# EAGLE board cs_v2 (EAGLE 9.6.1)
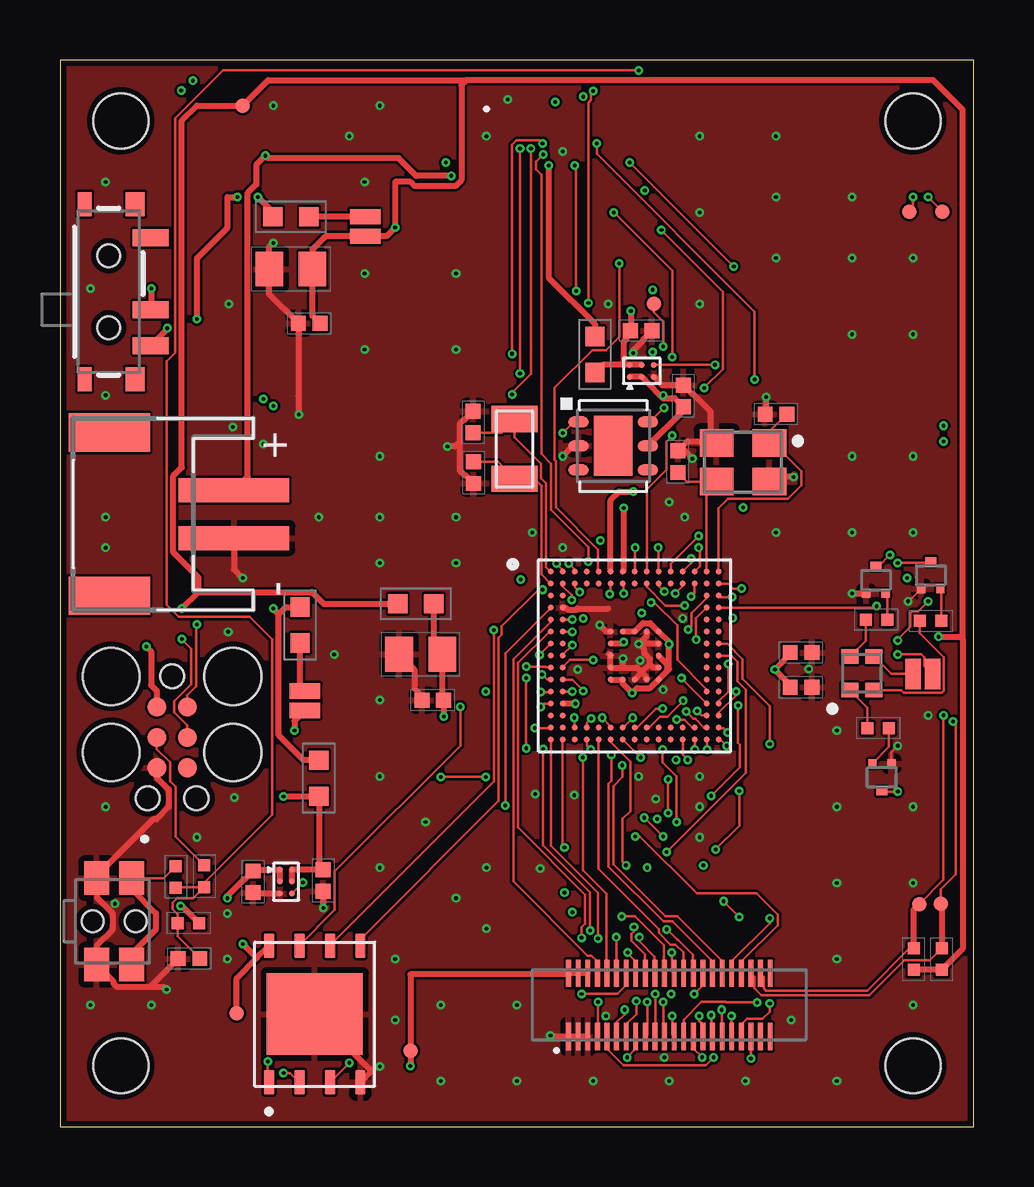
[diagram p0: board, top side]
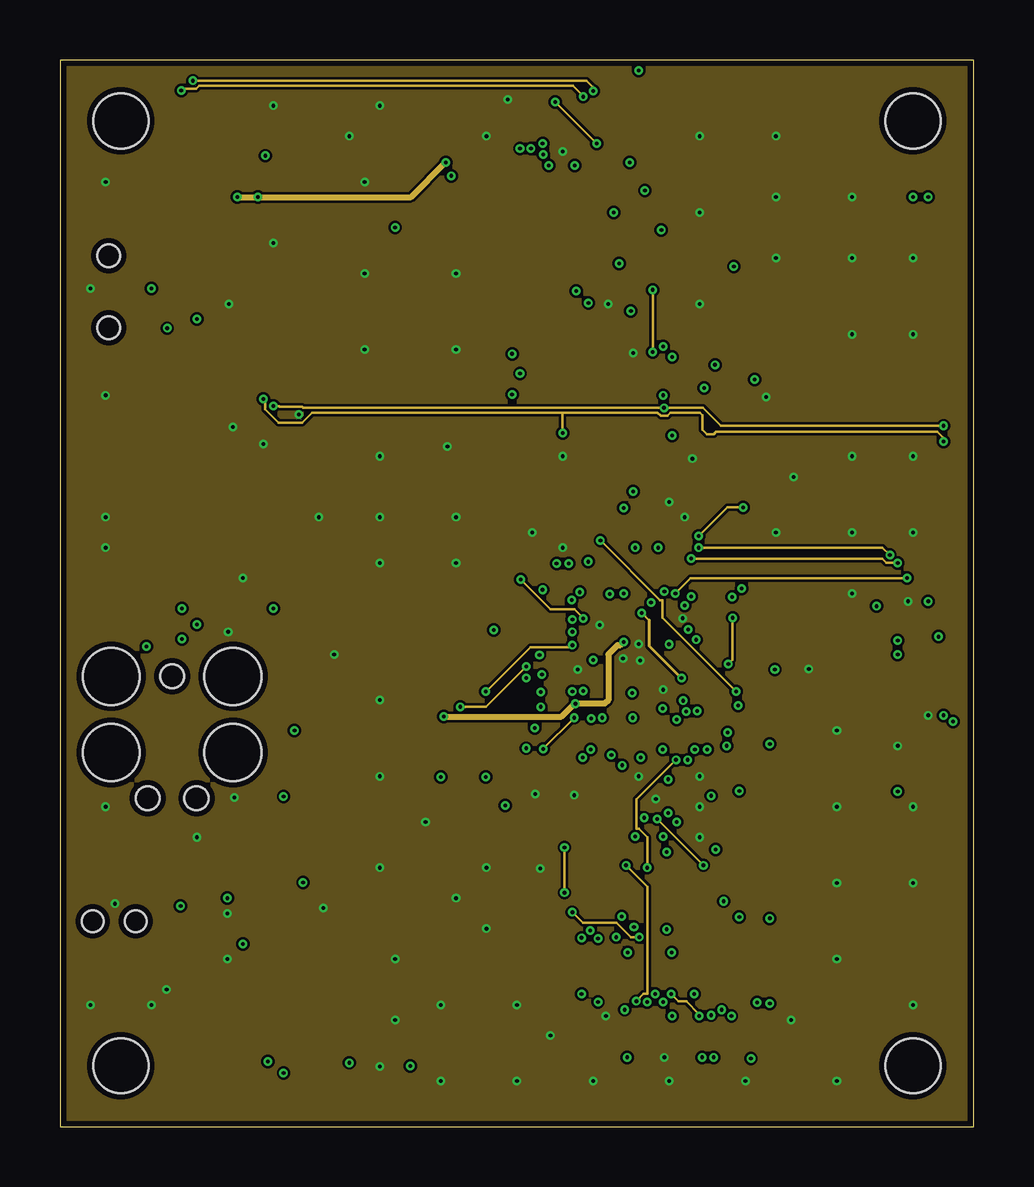
[diagram p1: board, inner layer Route2]
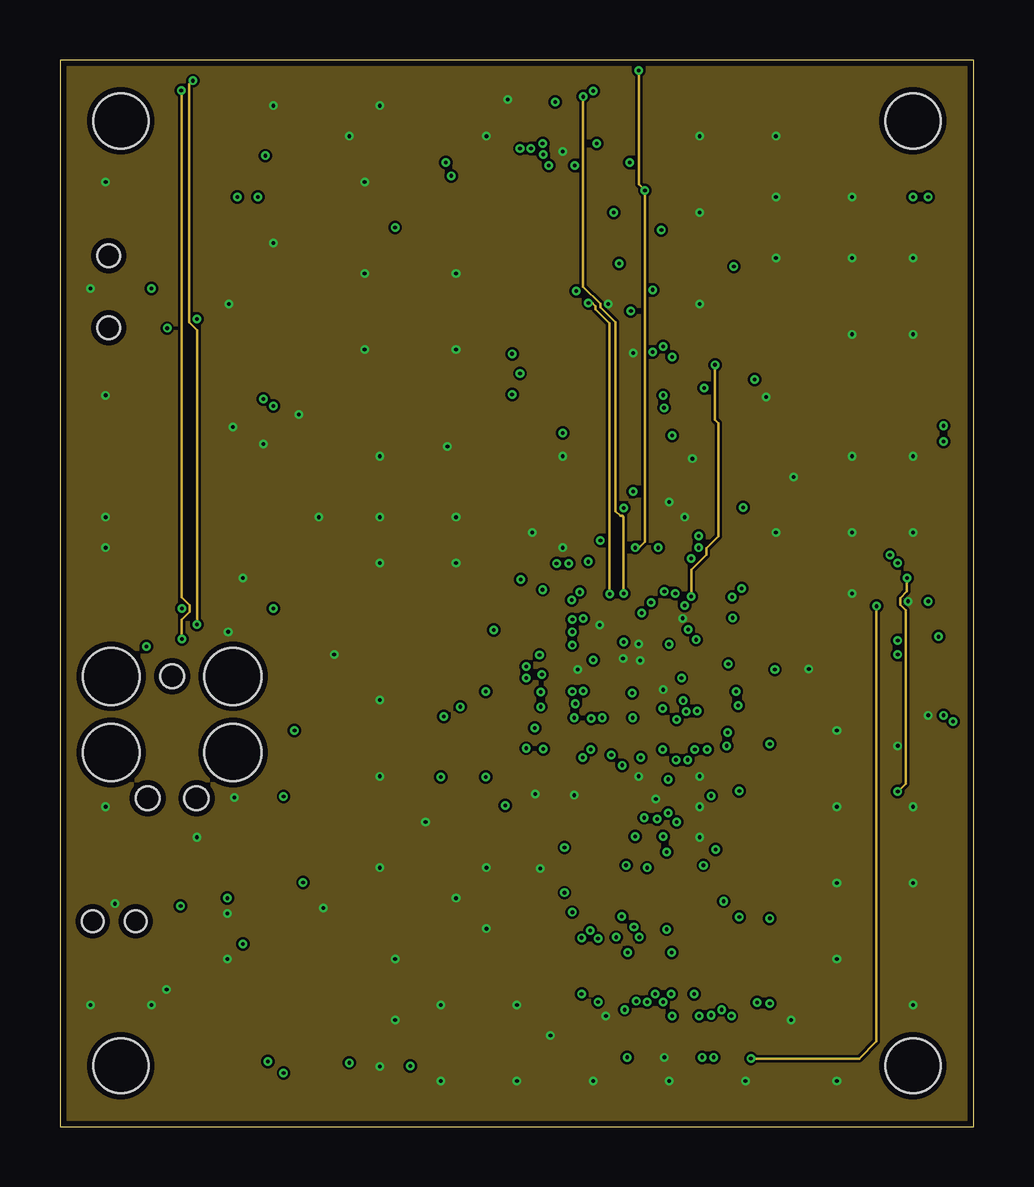
[diagram p2: board, inner layer Route15]
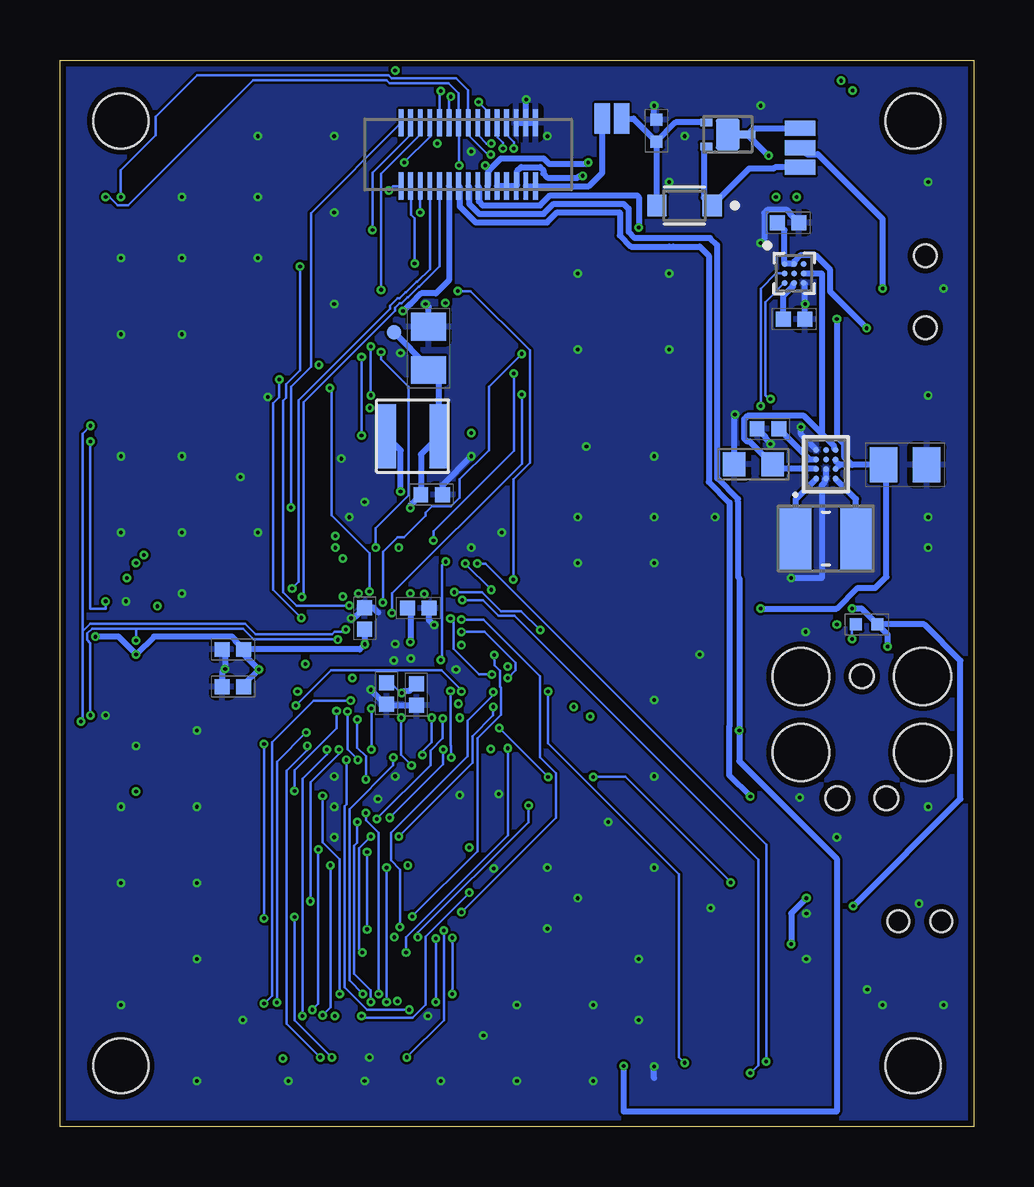
[diagram p3: board, bottom side, seen from below]

Size 38.1 x 44.45 mm. Coordinates in mm from the lower left corner, seen from the top.
Outline: 0,0 38.1,0 38.1,44.45 0,44.45 0,0
Copper layers (1+2*15+16): Top 0.001778125mm / dielectric 0.231140625mm / Route2 0.01778125mm / dielectric 0.929640625mm / Route15 0.01778125mm / dielectric 0.231140625mm / Bottom 0.01778125mm
Design rules "CSv2_bittele_4-layer *": minimum track width 4mil, minimum drill 6mil, track to track 4mil, track to pad 4mil, pad to pad 4mil, via to via 4mil, smd to smd 4mil, copper to edge 10mil, drill to drill 5mil, minimum pad ring 4mil, minimum via ring 4mil, stop-mask expansion 4mil, vias tented up to drill 0.154940625mm, thermal gap 10mil
Net classes: 1 power_3v3: width 0.254 mm; 5 10_mil: width 0.254 mm
Holes 2.29 mm at 2.54,2.54 35.56,2.54 35.56,41.91 2.54,41.91

## Footprints (pad centres in the part's own frame; a part is rotated, then mirrored left to right if it is on the bottom)
C0402 = smd 0.62 x 0.62: 1 -0.45,0; 2 0.45,0
C0805 = smd 1.15 x 1.45: 1 -0.9,0; 2 0.9,0
C0603 = smd 0.95 x 1: 1 -0.8,0; 2 0.8,0
TP06R = smd 0.6 x 0.6: TP 0,0
CUS520H3F = smd 0.8 x 0.9: N -1.15,0; P 1.15,0
DIALIGHT_0606_598-8710-307F_0 = smd 0.6 x 0.7: 1 -0.7,0.5; 2 0.7,0.5; 3 -0.7,-0.5; 4 0.7,-0.5
8.06.16_6-PIN_NEEDLE_ADAPTER_LEGS = smd 0.787 x 0.787: 1 -1.27,-0.635; 2 -1.27,0.635; 3 0,-0.635; 4 0,0.635; 5 1.27,-0.635; 6 1.27,0.635 | hole 0.991: -2.54,0; 2.54,1.015; 2.54,-1.015 | hole 2.375: -2.54,2.54; 0.635,2.54; 0.635,-2.54; -2.54,-2.54
JST-PH-2-SMT-RA = smd 1 x 4.6: 1 1,-3.7; 2 -1,-3.7 | smd 1.6 x 3.4: NC1 -3.4,1.5; NC2 3.4,1.5
HRS_DF40HC(3.0)-44DS-0.4V(51) = smd 0.2 x 1.14: 1 -4.2,-1.32; 2 -4.2,1.32; 3 -3.8,-1.32; 4 -3.8,1.32; 5 -3.4,-1.32; 6 -3.4,1.32; 7 -3,-1.32; 8 -3,1.32; 9 -2.6,-1.32; 10 -2.6,1.32; 11 -2.2,-1.32; 12 -2.2,1.32; 13 -1.8,-1.32; 14 -1.8,1.32; 15 -1.4,-1.32; 16 -1.4,1.32; 17 -1,-1.32; 18 -1,1.32; 19 -0.6,-1.32; 20 -0.6,1.32; 21 -0.2,-1.32; 22 -0.2,1.32; 23 0.2,-1.32; 24 0.2,1.32; 25 0.6,-1.32; 26 0.6,1.32; 27 1,-1.32; 28 1,1.32; 29 1.4,-1.32; 30 1.4,1.32; 31 1.8,-1.32; 32 1.8,1.32; 33 2.2,-1.32; 34 2.2,1.32; 35 2.6,-1.32; 36 2.6,1.32; 37 3,-1.32; 38 3,1.32; 39 3.4,-1.32; 40 3.4,1.32; 41 3.8,-1.32; 42 3.8,1.32; 43 4.2,-1.32; 44 4.2,1.32
HRS_DF40HC(3.0)-30DS-0.4V(51) = smd 0.2 x 1.14: 1 -2.8,-1.32; 2 -2.8,1.32; 3 -2.4,-1.32; 4 -2.4,1.32; 5 -2,-1.32; 6 -2,1.32; 7 -1.6,-1.32; 8 -1.6,1.32; 9 -1.2,-1.32; 10 -1.2,1.32; 11 -0.8,-1.32; 12 -0.8,1.32; 13 -0.4,-1.32; 14 -0.4,1.32; 15 0,-1.32; 16 0,1.32; 17 0.4,-1.32; 18 0.4,1.32; 19 0.8,-1.32; 20 0.8,1.32; 21 1.2,-1.32; 22 1.2,1.32; 23 1.6,-1.32; 24 1.6,1.32; 25 2,-1.32; 26 2,1.32; 27 2.4,-1.32; 28 2.4,1.32; 29 2.8,-1.32; 30 2.8,1.32
SMT-JUMPER_2_NC_PASTE_NO-SILK = smd 0.635 x 1.27: 1 -0.406,0; 2 0.406,0
SMT-JUMPER_3_1-NC_PASTE_NO-SILK = smd 0.635 x 1.27: 1 -0.813,0; 2 0,0; 3 0.813,0
L1212 = smd 0.813 x 2.667: P$1 -1.1,0; P$2 1.1,0
L0603 = smd 0.8 x 0.8: 1 -0.75,0; 2 0.75,0
L1008 = smd 1.308 x 2.54: 1 -1.257,0; 2 1.257,0
SSSMINI3 = smd 0.35 x 0.35: 1 -0.4,-0.575; 2 0.4,-0.575 | smd 0.45 x 0.35: 3 0,0.575
X2-DFN2015-3 = smd 0.309 x 0.5: 1 -0.5,-0.9; 2 0.5,-0.9 | smd 1.3 x 1: 3-1 0,0 | smd 0.309 x 0.65: 3-2 0,0.825
R0402 = smd 0.5 x 0.5: 1 -0.45,0; 2 0.45,0
R0603 = smd 0.8 x 0.8: 1 -0.75,0; 2 0.75,0
SW_EVQ-P7L01P = smd 1.4 x 1.05: 1_1 -1.8,0.725; 1_2 1.8,0.725; 2_1 -1.8,-0.725; 2_2 1.8,-0.725 | hole 0.9: 0,-0.9; 0,0.9
SWITCH_SPST_SMD_A = smd 0.7 x 1.5: 1 -2.25,-1.75; 2 -0.75,-1.75; 3 2.25,-1.75 | smd 1 x 0.6: GND1 -3.65,1; GND3 3.65,1 | smd 1 x 0.8: GND2 -3.65,-1.1; GND4 3.65,-1.1 | hole 0.95: -1.5,0; 1.5,0
TFBGA120 = smd 0.25 x 0.25: GNDANA0 -1,0; GNDIO0 -3,2; GNDIO1 -1,-0.5; GNDIO2 0,-1; GNDIO3 0.5,-1; GNDIO4 1,-0.5; GNDIO5 1,0.5; GNDIO6 0.5,1; GNDIO7 -1,1; NRESET 0,3.5; PA00 -3.5,3.5; PA01 -3.5,3; PA02 -3.5,1.5; PA03 -3,1; PA04 -3,-1; PA05 -3.5,-1.5; PA06 -3,-1.5; PA07 -3.5,-2; PA08 -3.5,-3.5; PA09 -2.5,-3; PA10 -3,-3.5; PA11 -2,-3; PA12 2,-3.5; PA13 2.5,-3; PA14 2.5,-3.5; PA15 3,-3.5; PA16 3.5,-3.5; PA17 3,-3; PA18 3.5,-3; PA19 3,-2.5; PA20 3,1.5; PA21 3.5,2; PA22 3,2; PA23 3,2.5; PA24 3.5,2.5; PA25 3.5,3; PA27 0,3; PA30 -0.5,3; PA31 -1,3; PB00 -2.5,3.5; PB01 -2.5,3; PB02 -3,3.5; PB03 -3,3; PB04 -3.5,1; PB05 -3.5,0.5; PB06 -3,0; PB07 -3.5,-0.5; PB08 -3,-0.5; PB09 -3.5,-1; PB10 -2.5,-3.5; PB11 -1.5,-3; PB12 -2,-3.5; PB13 -1,-3; PB14 -1.5,-3.5; PB15 -0.5,-3; PB16 3.5,0; PB17 3.5,0.5; PB18 3,0.5; PB19 3.5,1; PB20 3,1; PB21 3.5,1.5; PB22 3.5,3.5; PB23 3,3.5; PB24 3,3; PB25 2.5,3; PB26 2.5,3.5; PB27 2,3; PB28 2,3.5; PB29 1.5,3; PB30 -1.5,3.5; PB31 -1.5,3; PC00 -3.5,2.5; PC01 -3,2.5; PC02 -3.5,2; PC03 -3,1.5; PC04 -3.5,-2.5; PC05 -3,-2.5; PC06 -3.5,-3; PC07 -3,-3; PC10 1,-3; PC11 0.5,-3.5; PC12 1,-3.5; PC13 1.5,-3; PC14 1.5,-3.5; PC15 2,-3; PC16 3.5,-2.5; PC17 3,-2; PC18 3.5,-2; PC19 3,-1.5; PC20 3.5,-1.5; PC21 3,-1; PC22 3.5,-1; PC23 3,-0.5; PC24 1.5,3.5; PC25 1,3; PC26 1,3.5; PC27 0.5,3.5; PC28 0.5,3; PC30 -2,3.5; PC31 -2,3; PD00 -3,0.5; PD01 -3.5,0; PD08 -1,-3.5; PD09 0,-3; PD10 -0.5,-3.5; PD11 0.5,-3; PD12 0,-3.5; PD20 3.5,-0.5; PD21 3,0; VDDANA0 -1,0.5; VDDANA1 -3,-2; VDDCORE -0.5,3.5; VDDIO3 1,-1; VDDIO4 1,0; VDDIO5 1,1; VDDIO6 0,1; VDDIO7 -0.5,1; VDDIOB1 -1,-1; VDDIOB2 -0.5,-1; VSW -1,3.5
8-UDFN = smd 1.04 x 0.44: 1 -2.845,1.905; 2 -2.845,0.635; 3 -2.845,-0.635; 4 -2.845,-1.905; 5 2.845,-1.905; 6 2.845,-0.635; 7 2.845,0.635; 8 2.845,1.905 | smd 3.4 x 4: 9 0,0
BGA9N40P3X3_144X146X69N = smd 0.24 x 0.24: A1 -0.4,0.4; A2 0,0.4; A3 0.4,0.4; B1 -0.4,0; B2 0,0; B3 0.4,0; C1 -0.4,-0.4; C2 0,-0.4; C3 0.4,-0.4
12-WLP = smd 0.244 x 0.244: A1 -0.6,0.4; A2 -0.2,0.4; A3 0.2,0.4; A4 0.6,0.4; B1 -0.6,0; B2 -0.2,0; B3 0.2,0; B4 0.6,0; C1 -0.6,-0.4; C2 -0.2,-0.4; C3 0.2,-0.4; C4 0.6,-0.4
DFN-06 = smd 0.85 x 0.45: 1 -1.45,1; 2 -1.45,0; 3 -1.45,-1; 4 1.45,-1; 5 1.45,0; 6 1.45,1 | smd 1.6 x 2.5: 7 0,0
WLCSP6_2X3 = smd 0.254 x 0.254: A1 -0.25,0.5; A2 0.25,0.5; B1 -0.25,0; B2 0.25,0; C1 -0.25,-0.5; C2 0.25,-0.5
XTAL_EPSON_TSX3225 = smd 1.4 x 1.15: 1 -1.1,-0.8; 2 1.1,-0.8; 3 1.1,0.8; 4 -1.1,0.8
XTAL320X150X90 = smd 1.092 x 1.905: 1 -1.245,0; 2 1.245,0

## Placement (x,y rotation side)
C101  0.1u  [C0402]  5.38,7.01 180 top
C102  0.1u  [C0402]  30.89,18.31 0 top
C103  0.1u  [C0402]  22.61,26.34 0 bottom
C104  0.1u  [C0402]  30.89,18.34 180 bottom
C105  0.1u  [C0402]  23.16,21.62 0 bottom
C106  0.1u  [C0402]  30.89,19.89 180 bottom
C107  4.7u  [C0805]  22.73,32.44 90 bottom
C108  0.1u  [C0402]  15.54,17.78 180 top
C109  0.1u  [C0402]  30.89,19.76 0 top
C110  10u  [C0805]  15.04,19.68 180 top
C111  0.1u  [C0402]  23.24,18.01 270 bottom
C112  0.1u  [C0402]  25.4,21.18 90 bottom
C113  0.1u  [C0402]  24.49,18.06 270 bottom
C114  1u  [C0402]  10.39,33.48 180 top
C115  10u  [C0805]  9.63,35.74 180 top
C116  6.8p  [C0402]  29.84,29.69 180 top
C117  6.8p  [C0402]  25.76,27.71 90 top
C118  10p  [C0402]  17.22,29.36 90 top
C119  10p  [C0402]  17.25,27.25 270 top
C201  100n  [C0402]  7.75,37.67 0 bottom
C202  10u  [C0603]  9.19,27.61 180 bottom
C203  470n  [C0402]  7.49,33.66 0 bottom
C204  1u  [C0402]  8.59,29.08 180 bottom
C205  22u  [C0805]  2.87,27.58 0 bottom
C206  1u  [C0402]  10.97,10.26 270 top
C207  1u  [C0402]  24.23,33.17 0 top
C208  0.1u  [C0402]  8.05,10.21 270 top
C209  0.1u  [C0402]  25.98,30.45 90 top
CPU  TPTP06R  [TP06R]  24.18,33.1 180 bottom
D201  CUS520H3F  [CUS520H3F]  12.06,38.38 180 bottom
D202  DIALIGHT_RGBLED_598-8710-307FDIALIGHT_598-8710-307F_0_0  [DIALIGHT_0606_598-8710-307F_0]  33.43,18.9 90 top
DTR  TPTP06R  [TP06R]  14.61,3.17 180 top
J101  J-JTAG-CORTEX-NEEDLE6-LEGS  [8.06.16_6-PIN_NEEDLE_ADAPTER_LEGS]  4.67,16.23 270 top
J201  [JST-PH-2-SMT-RA]  3.56,25.53 90 top
J301  HIROSE-DF40_44-PIN_CONNECTORS-RECEPTACLE  [HRS_DF40HC(3.0)-44DS-0.4V(51)]  25.4,5.08 0 top
J302  HIROSE-DF40_30-PIN_CONNECTORS-RECEPTACLE  [HRS_DF40HC(3.0)-30DS-0.4V(51)]  21.08,40.51 180 bottom
JP201  JUMPER-SMT_2_NC_PASTE_NO-SILK  [SMT-JUMPER_2_NC_PASTE_NO-SILK]  15.09,42.01 180 bottom
JP202  JUMPER-SMT_2_NC_PASTE_NO-SILK  [SMT-JUMPER_2_NC_PASTE_NO-SILK]  35.97,18.87 0 top
JP203  JUMPER-SMT_3_1-NC_PASTE_NO-SILK  [SMT-JUMPER_3_1-NC_PASTE_NO-SILK]  7.24,40.79 90 bottom
JP204  JUMPER-SMT_2_NC_PASTE_NO-SILK  [SMT-JUMPER_2_NC_PASTE_NO-SILK]  12.73,37.52 90 top
JP205  JUMPER-SMT_2_NC_PASTE_NO-SILK  [SMT-JUMPER_2_NC_PASTE_NO-SILK]  10.21,17.75 90 top
L101  L1212  [L1212]  23.39,28.78 0 bottom
L102  L0603  [L0603]  14.83,21.79 180 top
L201  1u  [L1008]  6.17,24.51 0 bottom
PROC  TPTP06R  [TP06R]  7.62,42.55 270 top
Q201  FK3303010L  [SSSMINI3]  36.3,22.99 0 top
Q202  DMG3415UFY4Q-7F  [X2-DFN2015-3]  10.26,41.35 270 bottom
Q203  FK3303010L  [SSSMINI3]  34.26,14.55 180 top
Q204  FK3303010L  [SSSMINI3]  34.01,22.78 0 top
R101  10k  [R0402]  5.36,8.48 0 top
R102  330  [R0402]  4.83,10.41 90 top
R103  4.7k  [R0402]  36.75,6.99 270 top
R104  4.7k  [R0402]  35.59,6.99 270 top
R105  39  [R0402]  6.02,10.44 90 top
R106  1k  [R0402]  4.47,20.93 0 bottom
R201  10M  [R0402]  13.23,41.5 270 bottom
R202  590  [R0402]  36.3,21.08 0 top
R203  590  [R0402]  34.11,16.61 0 top
R204  1k  [R0402]  34.04,21.13 0 top
R205  10  [R0603]  22.3,32.18 270 top
R206  1  [R0603]  9.63,37.92 0 top
R207  0.51  [R0603]  10.01,20.9 270 top
R208  1  [R0603]  10.79,14.53 270 top
RXDBG  TPTP06R  [TP06R]  36.78,38.13 90 top
S101  SW_EVQ-P7L01P_SPST_RA  [SW_EVQ-P7L01P]  2.26,8.56 270 top
S201  [SWITCH_SPST_SMD_A]  2.03,34.8 90 top
SCL  TPTP06R  [TP06R]  36.73,9.3 90 top
SDA  TPTP06R  [TP06R]  35.81,9.27 90 top
STOR  TPTP06R  [TP06R]  7.37,4.72 90 top
TEMP  TPTP06R  [TP06R]  24.77,34.29 270 top
TXDBG  TPTP06R  [TP06R]  35.41,38.13 180 top
U101  ATSAMD51  [TFBGA120]  23.95,19.63 0 top
U102  AT25SF641-MHB-T  [8-UDFN]  10.62,4.7 90 top
U201  COULOMB-MAX17262  [BGA9N40P3X3_144X146X69N]  7.49,35.56 0 bottom
U202  MAX77827BEWC+T  [12-WLP]  6.17,27.61 90 bottom
U203  SENSOR-SI7006  [DFN-06]  23.06,28.37 0 top
U204  LOADSWITCH-MIC94164  [WLCSP6_2X3]  9.42,10.21 0 top
U205  LOADSWITCH-MIC94164  [WLCSP6_2X3]  24.26,31.5 90 top
Y101  16M  [XTAL_EPSON_TSX3225]  28.47,27.69 180 top
Y102  ABS07-32.768KHZ-9-T  [XTAL320X150X90]  18.95,28.24 270 top

## Library data of the parts
C101-C106 C108 C109 C111-C113 C208 C209 = Capacitors; MANUFACTURER: Kemet; PART_NO: C0402C104K8RACTU; TC: X7R; TOL: 10%; VOLTAGE: 10V
C107 = Capacitors; MANUFACTURER: Kemet; PART_NO: C0805C475K8RACTU; TC: X7R; TOL: 10%; VOLTAGE: 10V
C110 C115 = Capacitors; MANUFACTURER: Kemet; PART_NO: C0805C106M8RACTU; TC: X7R; TOL: 10%; VOLTAGE: 10V
C114 C206 C207 = Capacitors; MANUFACTURER: Kemet; PART_NO: C0402C105M8PACTU; TC: X5R; TOL: 10%; VOLTAGE: 10V
C116 C117 = Capacitors; MANUFACTURER: Kemet; PART_NO: C0402C689D8GAC7867; TC: X7R; TOL: 10%; VOLTAGE: 6.3V
C118 C119 = Capacitors; MANUFACTURER: Kemet; PART_NO: C0402C100C8GACTU; TC: X7R; TOL: 10%; VOLTAGE: 6.3V
C201 = Capacitors; MANUFACTURER: Kemet; MP: CC0402KRX5R5BB104; PART_NO: CC0402KRX5R5BB104; TC: X7R; TOL: 10%; VOLTAGE: 6.3V
C202 = Capacitors; MANUFACTURER: Kemet; PART_NO: C0603C106M8PAC7867; TC: X5R; TOL: 10%; VOLTAGE: 10V
C203 = Capacitors; MANUFACTURER: Kemet; MP: CC0402KRX5R5BB474; PART_NO: CC0402KRX5R5BB474; TC: X7R; TOL: 10%; VOLTAGE: 6.3V
C204 = Capacitors; MANUFACTURER: Kemet; PART_NO: C0402C105K8PACTU; TC: X5R; TOL: 10%; VOLTAGE: 10V
C205 = Capacitors; MANUFACTURER: Kemet; PART_NO: C0805C226M8PAC7800; TC: X5R; TOL: 10%; VOLTAGE: 10V
CPU DTR PROC RXDBG SCL SDA STOR TEMP TXDBG = TestPoints
D201 = Diodes; DESCRIPTION: Diode Schottky 30V 200mA Surface Mount USC; MF: Toshiba Semiconductor; MP: CUS520,H3F; PACKAGE: SOD-323 Toshiba; PART_NO: CUS520,H3F
D202 = Diodes; CENTROID_NOT_SPECIFIED: No; DATASHEET: https://media.digikey.com/pdf/Data%20Sheets/Dialight%20PDFs/598_Series_0606_Pkg.pdf; DIGIKEY_DESCRIPTION: DIODE LED RGB CLEAR 0606 SMD; DIGIKEY_PART_NUMBER: 350-2096-1-ND; LEAD_FREE: yes; MF: Dialight; MOUSER_PART_NUMBER: 645-598-8710-307F; MPN: 598-8710-307F; PACKAGE: LED_SMD; PART_NO: 598-8710-307F; PREFIX: D; ROHS: yes; TEMPERATURE_RANGE_HIGH: +100°C; TEMPERATURE_RANGE_LOW: -40°C
J101 = Connectors
J201 = Connectors; MANUFACTURER: JST Sales America Inc.; MPN: S2B-PH-SM4-TB(LF)(SN); PART_NO: S2B-PH-SM4-TB(LF)(SN)
J301 = Connectors; PART_NO: DF40HC(3.0)-44DS-0.4V(51)
J302 = Connectors; PART_NO: DF40HC(3.0)-30DS-0.4V(58)
JP201 JP202 JP204 JP205 = Connectors; BOM: EXCLUDE
JP203 = SparkFun-Jumpers
L101 = Inductors; PART_NO: LQH3NPN100MMEL
L102 = Inductors; PART_NO: BLM18PG471SN1D
L201 = Inductors; PART_NO: CIGT252010EH1R0MNE
Q201 Q203 Q204 = Switches; MANUFACTURER_PART_NUMBER: FK3303010L; PART_NO: FK3303010L; VENDOR: Panasonic
Q202 = Switches; PART_NO: DMG3415UFY4Q-7
R101 = Resistors; MANUFACTURER: Panasonic; PART_NO: ERJ-2GEJ103X; TOL: 5%
R102 = Resistors; MANUFACTURER: Panasonic; PART_NO: ERJ-2GEJ331X; TOL: 5%
R103 R104 = Resistors; MANUFACTURER: Panasonic; PART_NO: ERJ-2GEJ472X; TOL: 5%
R105 = Resistors; MANUFACTURER: Panasonic; PART_NO: ERJ-2GEJ390X; TOL: 5%
R106 = Resistors; MANUFACTURER: Panasonic; PART_NO: ERJ-2GEJ102X; TOL: 5%
R201 = Resistors; MANUFACTURER: Panasonic; PART_NO: ERJ-2GEJ106X; TOL: 5%
R202 R203 = Resistors; MANUFACTURER: Panasonic; PART_NO: ERJ-2RKF5900X; TOL: 1%
R204 = Resistors; MANUFACTURER: Panasonic; PART_NO: ERA-2AED102X; TOL: 0.5%
R205 = Resistors; MANUFACTURER: Panasonic; PART_NO: ERA-3AHD100V; TOL: 0.5%
R206 R208 = Resistors; MANUFACTURER: Panasonic; PART_NO: ERJ-3RQF1R0V; TOL: 1%
R207 = Resistors; MANUFACTURER: Panasonic; PART_NO: ERJ-3BQFR51V; TOL: 1%
S101 = Switches; DESCRIPTION: Tactile Switch SPST-NO Side Actuated Surface Mount, Right Angle; MF: Panasonic; MP: EVQP7L01P; PART_NO: EVQP7L01P
S201 = Switches; MANUFACTURER: Nidec Copal Electronics; MPN: CUS-12TB; PART_NO: CUS-12TB
U101 = Processors; DIGI-KEY_PART_NUMBER: ATSAMD51P20A-CTUTCT-ND; DIGI-KEY_PURCHASE_URL: https://www.digikey.com/product-detail/en/ATSAMD51P20A-CTUT/ATSAMD51P20A-CTUTCT-ND/8594973?utm_campaign=buynow&WT.z_cid=ref_octopart_dkc_buynow&utm_medium=aggregator&curr=usd&site=us&utm_source=octopart; MF: Microchip; MP: ATSAMD51P20A-CTUT; PACKAGE: 120-TFBGA; PART_NO: ATSAMD51P20A-CTUT
U102 = Storage; PART_NO: AT25SF641-MHB-T
U201 = CoulombCounters; MANUFACTURER: Maxim Integrated; MP: MAX17262REWL+T; MPN: MAX17262REWL+T; PART_NO: MAX17262REWL+T
U202 = Regulators; BUILT_BY: EMA_Molly; COPYRIGHT: Copyright (C) 2018 Accelerated Designs. All rights reserved; MANUFACTURER: Maxim; MANUFACTURER_PART_NUMBER: MAX77827BEWC+T; MPN: MAX77827BEWC+; PART_NO: MAX77827BEWC+T; VENDOR: Maxim Integrated Products
U203 = Sensors; MANUFACTURER: Silicon Laboratories; MPN: SI7021-A20-GM1R; PART_NO: SI7021-A20-GM1R
U204 U205 = Switches; MANUFACTURER: Microchip Technology; MPN: MIC94164YCS-TR; PART_NO: MIC94164YCS-TR; PART_NUMBER: MIC94164; QUENCH: YES; SOFTSTART: YES
Y101 = Oscillators; BUILT_BY: EMA_Matt; COPYRIGHT: Copyright (C) 2018 Accelerated Designs. All rights reserved; MANUFACTURER_PART_NUMBER: TSX-3225 16.0000MF09Z-AC3; PART_NO: TSX-3225 16.0000MF09Z-AC3; VENDOR: Epson
Y102 = Oscillators; DESCRIPTION: 32.768kHz ±20ppm Crystal 9pF 70 kOhms 2-SMD, No Lead; MF: Abracon; MP: ABS07-32.768KHZ-9-T; PACKAGE: SMD-2 Abracon; PART_NO: ABS07-32.768KHZ-9-T

## Nets
+3V3 [power_3v3]: C205.1 J302.12 R205.1 R206.1 R207.1 R208.1 U202.C2 U202.C3
+3V3_DTR [power_3v3]: DTR.TP J301.2 J301.4 J301.6 J302.16 JP205.1
+3V3_DTR_SENSE: JP205.2 R207.2
+3V3_PROC: C102.1 C104.1 C106.1 C109.1 C111.1 C112.1 C113.1 C114.1 C115.1 J101.1 J302.14 JP202.2 JP204.1 L102.2 PROC.TP R101.2 R103.2 R104.2 R106.2 U101.VDDIO3 U101.VDDIO4 U101.VDDIO5 U101.VDDIO6 U101.VDDIO7 U101.VDDIOB1 U101.VDDIOB2
+3V3_PROC_SENSE: JP204.2 R206.2
+3V3_STOR [power_3v3]: C208.1 STOR.TP U102.8 U204.A1 U204.B1
+3V3_STOR_SENSE: C206.1 J302.18 R208.2 U204.A2 U204.B2
+3V3_TEMP: C209.1 TEMP.TP U203.5 U205.A1 U205.B1
+3V3_TEMP_SENSE: C207.1 J302.20 R205.2 U205.A2 U205.B2
+3V7_BATT [power_3v3]: J201.1 J302.6 J302.8 J302.10 JP203.3 Q202.3-1 Q202.3-2
CC_IN [power_3v3]: C201.1 S201.1 U201.A1 U201.A2
DBG_GPIO0: J302.7 U101.PC16
DBG_GPIO1: J302.9 U101.PC17
DBG_GPIO2: J302.11 U101.PC18
DBG_GPIO3: J302.13 U101.PC19
DBG_SERIAL_RX_SERCOM4: J302.17 RXDBG.TP U101.PB09
DBG_SERIAL_TX_SERCOM4: J302.15 TXDBG.TP U101.PB08
DBG_SWCLK: J101.4 J302.19 R106.1 U101.PA30
DBG_SWDIO: J101.2 J302.21 U101.PA31
DBG_TRACE_CLK: J302.26 U101.PC27
DBG_TRACE_D0: J302.23 U101.PC28
DBG_TRACE_D1: J302.25 U101.PC26
DBG_TRACE_D2: J302.27 U101.PC25
DBG_TRACE_D3: J302.29 U101.PC24
DBG_TRACE_SWO: J302.28 U101.PB30
DBG_USB_D_N [differential]: J302.22 U101.PA24
DBG_USB_D_P [differential]: J302.24 U101.PA25
DTR_BUS0_AIN0: J301.8 U101.PA02
DTR_BUS0_AIN1: J301.16 U101.PA03
DTR_BUS0_GPIO0: J301.24 U101.PB12
DTR_BUS0_GPIO1: J301.32 U101.PB13
DTR_BUS0_SERCOM0_P0: J301.7 U101.PA08
DTR_BUS0_SERCOM0_P1: J301.15 U101.PA09
DTR_BUS0_SERCOM0_P2: J301.23 U101.PA10
DTR_BUS0_SERCOM0_P3: J301.31 U101.PA11
DTR_BUS1_AIN0: J301.10 U101.PA04
DTR_BUS1_AIN1: J301.18 U101.PA05
DTR_BUS1_GPIO0: J301.26 U101.PB14
DTR_BUS1_GPIO1: J301.34 U101.PB15
DTR_BUS1_SERCOM1_P0: J301.9 U101.PA16
DTR_BUS1_SERCOM1_P1: J301.17 U101.PA17
DTR_BUS1_SERCOM1_P2: J301.25 U101.PA18
DTR_BUS1_SERCOM1_P3: J301.33 U101.PA19
DTR_BUS2_AIN0: J301.12 U101.PC02
DTR_BUS2_AIN1: J301.20 U101.PC03
DTR_BUS2_GPIO0: J301.28 U101.PB16
DTR_BUS2_GPIO1: J301.36 U101.PB17
DTR_BUS2_SERCOM2_P0: J301.11 U101.PA12
DTR_BUS2_SERCOM2_P1: J301.19 U101.PA13
DTR_BUS2_SERCOM2_P2: J301.27 U101.PA14
DTR_BUS2_SERCOM2_P3: J301.35 U101.PA15
DTR_BUS3_AIN0: J301.14 U101.PB04
DTR_BUS3_AIN1: J301.22 U101.PB05
DTR_BUS3_GPIO0: J301.30 U101.PA06
DTR_BUS3_GPIO1: J301.38 U101.PA07
DTR_BUS3_SERCOM7_P0: J301.13 U101.PD08
DTR_BUS3_SERCOM7_P1: J301.21 U101.PD09
DTR_BUS3_SERCOM7_P2: J301.29 U101.PD10
DTR_BUS3_SERCOM7_P3: J301.37 U101.PD11
DTR_DETECT: J301.39 U101.PA21
DTR_MASTER_I2C_SCL: J301.40 R103.1 SCL.TP U101.PA23 U201.B1 U203.6
DTR_MASTER_I2C_SDA: J301.42 R104.1 SDA.TP U101.PA22 U201.C1 U203.1
DTR_MASTER_IRQ: J301.44
DTR_V_SENSE-: J301.43
EN_STOR: U101.PC06 U204.C2
EN_TEMP: U101.PB25 U205.C2
GND: C101.2 C102.2 C103.2 C104.2 C105.2 C106.2 C107.2 C108.2 C109.2 C110.2 C111.2 C112.2 C113.2 C114.2 C115.2 C116.2 C117.2 C118.2 C119.2 C201.2 C202.2 C203.2 C204.2 C205.2 C206.2 C207.2 C208.2 C209.2 J101.5 J201.2 J301.1 J301.3 J301.5 J302.1 J302.3 J302.5 Q201.1 Q203.1 Q204.1 R201.1 S101.2_1 S101.2_2 U101.GNDANA0 U101.GNDIO0 U101.GNDIO1 U101.GNDIO2 U101.GNDIO3 U101.GNDIO4 U101.GNDIO5 U101.GNDIO6 U101.GNDIO7 U102.4 U102.9 U201.C3 U202.A4 U202.B1 U202.B2 U203.2 U204.C1 U205.C1 Y101.2 Y101.4
JTAG_NRESET: J101.3 R105.2
LED_B: Q201.3 U101.PB28
LED_G: Q203.3 U101.PB27
LED_R: Q204.3 U101.PB26
LED_VIN: D202.4 JP202.1
N$4: D202.3 R202.1
N$5: R102.2 S101.1_1 S101.1_2
N$12: D202.1 R203.1
N$13: C203.1 U201.C2
N$14: D202.2 R204.1
N$15: Q201.2 R202.2
N$16: Q203.2 R203.2
N$17: Q204.2 R204.2
NRESET: C101.1 J302.30 R101.1 R102.1 R105.1 U101.NRESET
STOR_HOLD: U101.PB07 U102.7
STOR_SPI5_MISO: U101.PB03 U102.2
STOR_SPI5_MOSI: U101.PB00 U102.5
STOR_SPI5_NCS: U101.PB02 U102.1
STOR_SPI5_SCK: U101.PB01 U102.6
STOR_WP: U101.PB06 U102.3
VDD_DBG [power_3v3]: J302.2 J302.4 JP201.2
VDD_DBG_JMP [power_3v3]: D201.P JP201.1 Q202.1 R201.2
VDD_SW [power_3v3]: D201.N JP203.1 Q202.2
VDD_SW_IN [power_3v3]: JP203.2 S201.2
VDDANA: C105.1 C108.1 C110.1 L102.1 U101.VDDANA0 U101.VDDANA1
VDDCORE: C103.1 C107.1 CPU.TP L101.P$2 U101.VDDCORE
VREG_BIAS: C204.1 U202.A3
VREG_IN [power_3v3]: C202.1 U201.B3 U202.A2 U202.C4
VREG_LX1: L201.1 U202.A1
VREG_LX2: L201.2 U202.C1
VSW: L101.P$1 U101.VSW
XIN: C116.1 U101.PB22 Y101.1
XIN32: C118.1 U101.PA00 Y102.1
XOUT: C117.1 U101.PB23 Y101.3
XOUT32: C119.1 U101.PA01 Y102.2

## Tracks (layer width: path | path; a pad name or v marks a point on that pad's centre or on a via)
+3V3  (via drill 0.15)
  Top 0.254: v8.26,38.73 8.88,38.11 R206.1 | R208.1 10.16,15.28 9.12,16.32 9.12,21.36 | v7.39,38.73 6.99,38.73 6.99,37.47 5.71,36.2 v5.71,33.66 | R205.1 22.3,33.45 20.37,35.38 20.37,39.37 v20.37,40.06 | 9.12,21.36 v8.89,21.59 | 9.12,21.36 9.41,21.65 R207.1
  Route2 0.254: v16.08,40.18 14.63,38.73 v8.26,38.73 v7.39,38.73
  Bottom 0.254: J302.12 20.24,39.24 20.24,39.83 20.19,39.88 | 20.19,39.88 19.72,40.35 17.94,40.35 17.7,40.11 16.15,40.11 v16.08,40.18 | v8.89,21.59 5.71,21.59 4.85,22.45 4.12,22.45 3.65,22.92 3.65,27.46 C205.1 5.08,27.58 | 5.08,27.58 5.6,27.58 | 5.6,27.58 U202.C2 | 5.6,27.58 5.77,27.76 U202.C3 | 5.08,27.58 5.42,27.92 5.42,28.45 5.71,28.75 v5.71,33.66 | 20.19,39.88 v20.37,40.06
+3V3_DTR  (via drill 0.15)
  Top 0.254: J301.6 21.61,6.4 | 21.61,6.4 J301.4 | J301.4 J301.2 21.15,6.35 14.61,6.35 DTR.TP v14.61,2.54 | JP205.1 9.78,16.92 v9.78,16.51 | J301.4 21.61,6.4
  Bottom 0.254: J302.16 21.04,39.15 21.04,38.45 20.62,38.04 17.94,38.04 17.52,38.46 14.61,38.46 14.4,38.25 14.4,37.29 14.15,37.03 11,37.03 10.7,36.73 10.7,27.02 9.84,26.15 9.84,26.04 9.84,22.92 9.78,22.86 v9.78,16.51 9.78,15.24 5.71,11.18 5.71,0.64 14.61,0.64 v14.61,2.54
+3V3_DTR_SENSE
  Top 0.254: JP205.2 10.01,18.36 R207.2
+3V3_PROC  (via drill 0.15)
  Top 0.102: JP202.2 36.03,19.21 36.03,19.57 35.91,19.68 v34.92,19.68 | U101.VDDIO5
  Top 0.254: C114.1 10.53,33.79 C115.1 10.53,36.56 11.07,37.11 JP204.1 13.61,37.11 v13.97,37.47 13.97,39.37 14.61,39.37 14.78,39.19 16.49,39.19 16.74,39.45 16.74,43.41 16.94,43.61 | L102.2 10.99,21.79 10.5,22.28 5.77,22.28 | U101.VDDIO7 U101.VDDIO6 24.1,20.78 24.3,20.99 24.6,20.99 U101.VDDIO5 | U101.VDDIO5 | 25.31,18.99 25.1,18.78 U101.VDDIO3 24.81,18.49 24.6,18.28 24.05,18.28 v23.85,18.08 23.45,18.48 U101.VDDIOB2 U101.VDDIOB1 | 25.31,18.99 25.31,19.28 U101.VDDIO4 | C102.1 30.44,18.41 v29.8,19.05 30.44,19.68 C109.1 | 37.63,20.32 37.63,42.38 36.4,43.61 16.94,43.61 | 25.31,18.99 25.39,19.07 v25.39,20.11 25.39,20.2 U101.VDDIO5 | R101.2 5.1,9.2 v5.03,9.2 | J101.1 4.04,18.17 3.8,18.41 3.8,19.82 v3.61,20.02 | v5.08,21.59 5.77,22.28 | 5.77,22.28 5.77,22.89 4.73,23.93 4.73,27.12 5.08,27.47 5.08,41.91 5.71,42.55 PROC.TP 8.69,43.61 16.94,43.61 | R104.2 R103.2 37.63,7.41 37.63,20.32 | v36.63,20.42 37.53,20.42 37.63,20.32
  Bottom 0.102: v23.85,18.08 23.95,18.14 24.33,18.52 C113.1
  Bottom 0.254: J302.14 20.64,39.15 20.64,38.55 20.48,38.39 18.09,38.39 17.67,38.81 14.05,38.81 13.97,38.73 v13.97,37.47 | C106.1 25.61,19.89 v25.39,20.11 v25.4,20.12 C112.1 | C106.1 30.44,19.68 v29.8,19.05 30.44,18.41 C104.1 | C111.1 23.55,18.15 23.77,18.15 v23.84,18.08 v23.85,18.08 | v5.03,9.2 0.56,13.66 0.56,19.42 2.07,20.93 R106.2 | R106.2 3.61,20.52 v3.61,20.02 | R106.2 4.68,21.59 v5.08,21.59 | C106.1 30.8,20.25 30.8,20.29 30.93,20.43 34.18,20.43 v34.92,19.68 35.66,20.42 v36.63,20.42
+3V3_PROC_SENSE
  Top 0.254: JP204.2 R206.2
+3V3_STOR  (via drill 0.15)
  Top 0.254: STOR.TP 7.37,6.2 8.2,7.04 | 8.2,7.04 U102.8 | U204.B1 U204.A1 8.1,10.71 C208.1 7.69,10.3 7.65,10.3 6.99,9.64 v6.99,9.53 | v7.62,7.62 8.2,7.04
  Bottom 0.254: v6.99,9.53 7.62,8.89 v7.62,7.62
+3V3_STOR_SENSE  (via drill 0.15)
  Top 0.254: U204.B2 U204.A2 10.79,10.71 | C206.1 10.79,10.71 | 10.79,10.71 R208.2 10.78,13.77 v9.32,13.77
  Bottom 0.254: J302.18 21.44,39.15 21.44,38.35 20.77,37.68 17.79,37.68 17.38,38.1 14.76,38.1 14.76,37.14 14.3,36.68 12.7,36.68 12.55,36.68 11.43,36.68 11.05,36.3 11.05,26.87 10.19,26.01 10.19,23.53 10.19,23.5 10.19,16.71 10.21,16.69 10.21,14.66 v9.32,13.77
+3V3_TEMP  (via drill 0.15)
  Top 0.102: TEMP.TP 24.77,33.93 25.15,33.55 v25.15,32.51 | v25.15,30.48 25.15,30.37
  Top 0.254: U205.A1 U205.B1 24.4,31.1 25.13,30.37 25.15,30.37 25.62,30.37 C209.1 25.98,29.84 U203.5
  Bottom 0.102: v25.15,30.48 v25.15,32.51
+3V3_TEMP_SENSE  (via drill 0.15)
  Top 0.254: R205.2 22.61,31.75 23.5,31.75 | v23.8,33.98 23.8,33.19 C207.1 23.6,32.99 23.6,32.8 23.5,32.7 23.5,31.75 | 23.5,31.75 U205.A2 U205.B2
  Bottom 0.254: J302.20 21.88,35.27 22.43,34.72 23.04,34.72 23.47,34.29 23.5,34.29 v23.8,33.98
+3V7_BATT  (via drill 0.15)
  Top 0.254: v16.31,39.62 14.85,39.62 14.12,40.36 8.66,40.36 v8.56,40.46 8.18,40.08 8.18,39.27 7.82,38.91 7.82,27.09 J201.1
  Bottom 0.254: J302.8 J302.6 19.04,39.24 19.04,39.83 18.88,39.99 18.09,39.99 17.95,39.86 17.95,39.72 17.78,39.55 16.51,39.55 16.43,39.62 v16.31,39.62 | J302.8 | J302.8 J302.10 | JP203.3 9.17,41.6 9.44,41.34 | J302.8 | 9.44,41.34 Q202.3-2 Q202.3-1 | v8.56,40.46 9.44,41.34
CC_IN  (via drill 0.15)
  Top 0.254: S201.1 4.47,33.24 v4.47,33.27
  Bottom 0.254: 7.49,36.05 7.24,36.31 6.6,36.31 5.99,35.71 5.99,34.8 v4.47,33.27 | 7.49,36.05 7.59,35.96 U201.A1 7.89,37.36 C201.1 | 7.49,36.05 U201.A2
DBG_GPIO0  (via drill 0.15)
  Top 0.102: v28.19,18.14 28.19,17.98 27.46,17.25 27.46,17.14 U101.PC16 | v19.18,40.77 v19.18,31.39
  Route2 0.102: v28.19,18.14 25.12,21.21 25.12,21.95 25.02,21.95 v22.53,24.43
  Bottom 0.102: v22.53,24.43 22.53,24.82 19.18,28.17 v19.18,31.39 | v19.18,40.77 19.18,41.02 19.48,41.33 19.48,41.81 J302.7
DBG_GPIO1  (via drill 0.15)
  Top 0.102: v25.91,18.69 26.95,17.65 U101.PC17 | v18.85,30.5 18.85,30.58 19.63,31.37 v19.63,40.77
  Route2 0.102: v24.26,21.41 24.56,21.11
  Route2 0.127: 24.56,21.11 24.56,20.04 v25.91,18.69
  Bottom 0.102: v24.26,21.41 24.26,22.23 18.85,27.64 v18.85,30.5 | v19.63,40.77 19.63,41 19.86,41.22 19.86,41.81 J302.9
DBG_GPIO2  (via drill 0.15)
  Top 0.102: v27.86,19.28 27.86,18.14 27.46,17.73 27.46,17.65 U101.PC18 | v28.96,31.14 28.96,33.96 22.38,40.54 v22.38,40.97
  Route2 0.102: v27.86,19.28 28.04,19.46 v28.04,21.21 | v20.65,42.7 v22.38,40.97
  Bottom 0.102: v28.04,21.21 29.21,22.38 29.21,30.15 28.96,30.4 v28.96,31.14 | v20.65,42.7 20.3,42.34 20.3,41.83 J302.11
DBG_GPIO3  (via drill 0.15)
  Top 0.102: v24.64,21.84 24.79,21.84 25.73,20.9 25.73,19.46 26.95,18.24 U101.PC19 | v18.85,32.21 18.85,40.92 19.02,41.1 19.99,41.1 v20.12,40.97
  Bottom 0.102: v24.64,21.84 24.64,23.95 24.03,24.56 23.75,24.56 22.86,25.45 22.86,25.58 22.58,25.86 21.79,25.86 21.44,26.21 21.44,26.98 20.22,28.19 20.22,30.84 v18.85,32.21 | v20.12,40.97 20.32,40.97 20.68,41.33 20.68,41.81 J302.13
DBG_SERIAL_RX_SERCOM4  (via drill 0.15)
  Top 0.102: v36.2,38.73 36.78,38.15 RXDBG.TP | v20.09,18.85 20.3,18.64 20.45,18.64 U101.PB09 | v21.51,34.82 21.51,40.01 v21.46,40.06
  Route2 0.102: v21.82,21.18 21.44,21.57 20.45,21.57 v19.2,22.81
  Bottom 0.102: v36.2,38.73 36.03,38.73 35.7,38.41 35.26,38.41 30.05,43.61 24.48,43.61 24.35,43.48 21.89,43.48 21.48,43.07 J302.17 21.46,41.78 v21.46,40.06 | v20.09,18.85 20.62,18.85 21.69,19.91 21.69,21.06 v21.82,21.18 | v19.2,22.81 19.2,26.98 18.52,27.66 18.52,32.36 20.98,34.82 v21.51,34.82
DBG_SERIAL_TX_SERCOM4  (via drill 0.15)
  Top 0.102: v35.56,38.73 35.56,38.28 TXDBG.TP | U101.PB08 20.95,19.15 21.26,19.46 v22.23,19.46 | v22.02,23.55 22.02,24.16 20.47,25.7 20.47,27.64 20.07,28.04 20.07,39.67 19.84,39.9 19.84,40.21 v20.14,40.51
  Bottom 0.102: v35.56,38.73 35.56,39.86 34.11,41.31 34.11,42.09 32.38,43.81 24.39,43.81 24.27,43.69 21.59,43.69 21.08,43.18 J302.15 21.08,41.78 21.08,41.33 20.27,40.51 v20.14,40.51 | v22.02,23.55 22.17,23.39 22.17,19.51 v22.23,19.46
DBG_SWCLK  (via drill 0.15)
  Top 0.102: J101.4 5.31,16.73 4.76,17.27 4.76,17.73 5.47,18.44 5.47,19.93 v5.08,20.32 | U101.PA30 23.5,22.59 v23.5,22.23
  Route2 0.102: v21.81,42.92 21.81,42.96 21.39,43.38 5.8,43.38 5.67,43.26 5.16,43.26 5.08,43.18 v5.05,43.18
  Route15 0.102: v5.05,43.18 5.08,43.16 5.08,22.06 5.41,21.73 5.41,21.45 5.08,21.12 v5.08,20.32 | v23.5,22.23 23.5,25.4 23.44,25.45 23.36,25.45 23.16,25.64 23.16,33.52 22.53,34.15 22.53,34.29 21.81,35.01 v21.81,42.92
  Bottom 0.102: v5.08,20.32 5.08,20.77 R106.1 | J302.19 21.88,42.85 v21.81,42.92
DBG_SWDIO  (via drill 0.15)
  Top 0.102: J101.2 5.31,17.99 5.68,18.36 5.68,20.92 5.71,20.95 v5.71,20.93 | U101.PA31 22.95,22.25 v22.91,22.2 | v22.03,34.32 22.03,42.67 22.14,42.78 22.14,43.07 v22.23,43.16
  Route2 0.102: v5.54,43.59 21.95,43.59 22.23,43.31 v22.23,43.16
  Route15 0.102: v5.71,20.93 5.71,33.19 5.38,33.52 5.38,41.58 5.38,43.43 v5.54,43.59 | v22.91,22.2 22.91,33.48 22.33,34.07 22.33,34.19 22.19,34.32 v22.03,34.32
  Bottom 0.102: v22.23,43.16 22.28,43.1 J302.21
DBG_TRACE_CLK  (via drill 0.15)
  Top 0.102: v25.53,28.8 25.27,28.55 25.27,27.38 24.46,26.57 U101.PC27 | v25.53,32.08 25.53,35.66 v23.09,38.1
  Bottom 0.102: v25.53,32.08 v25.53,28.8 | v23.09,38.1 J302.26
DBG_TRACE_D0  (via drill 0.15)
  Top 0.102: v26.04,21.72 25.25,21.72 24.46,22.5 U101.PC28 | v23.75,40.18 v28.09,35.84
  Bottom 0.102: v26.04,21.72 28.25,21.72 28.8,22.28 28.8,30.25 28.68,30.38 28.68,30.94 28.09,31.52 v28.09,35.84 | v23.75,40.18 22.68,41.25 22.68,41.81 J302.23
DBG_TRACE_D1  (via drill 0.15)
  Top 0.102: v24.94,24.13 U101.PC26
  Route2 0.102: v24.71,34.87 v24.71,32.28
  Bottom 0.102: v24.94,24.13 24.94,24.94 23.57,26.31 23.57,30.84 24.71,31.98 v24.71,32.28 | v24.71,34.87 24.71,39.7 23.09,41.33 23.09,41.81 J302.25
DBG_TRACE_D2  (via drill 0.15)
  Top 0.102: v25.2,22.3 24.97,22.53 24.97,22.63 U101.PC25 | v26.85,30.79 27.64,31.57 27.64,34.8 v25.07,37.36
  Bottom 0.102: v25.2,22.3 25.2,23.9 26.77,25.48 26.77,30.71 v26.85,30.79 | v25.07,37.36 25.07,39.75 23.5,41.33 23.5,41.81 J302.27
DBG_TRACE_D3  (via drill 0.15)
  Top 0.102: v26.62,24.61 25.48,23.47 25.48,23.14 U101.PC24
  Route2 0.102: v26.62,24.61 27.81,25.81 v28.47,25.81
  Bottom 0.102: v28.47,25.81 28.47,30.84 27.64,31.67 27.64,38.08 23.9,41.81 J302.29
DBG_TRACE_SWO  (via drill 0.15)
  Top 0.102: v23.32,35.97 23.32,32.92 22.76,32.36 22.2,32.36 20.62,30.79 20.62,27.79 20.68,27.74 20.68,25.81 22.43,24.05 22.43,23.14 U101.PB30
  Bottom 0.102: v23.32,35.97 23.32,37.85 23.47,38 J302.28
DBG_USB_D_N  (via drill 0.15)
  Top 0.102: v28.02,22.07 27.51,22.07 U101.PA24
  Bottom 0.102: J302.22 22.28,35.85 23.13,35 23.16,35 23.59,34.57 23.61,34.57 23.86,34.31 23.94,34.31 24.13,34.12 24.13,34 27.94,30.19 27.94,22.15 v28.02,22.07
DBG_USB_D_P  (via drill 0.15)
  Top 0.102: U101.PA25 27.87,22.63 28.08,22.43 v28.42,22.43
  Bottom 0.102: J302.24 22.68,35.74 23.22,35.2 23.24,35.2 23.67,34.77 23.7,34.77 23.95,34.52 24.02,34.52 24.33,34.21 24.33,34.09 28.14,30.28 28.14,22.71 v28.42,22.43
DTR_BUS0_AIN0
  Top 0.102: U101.PA02 20.45,21.03 18.9,19.48 18.9,10.24 22,7.14 22.15,7.14 22.38,6.91 22.38,6.4 J301.8
DTR_BUS0_AIN1  (via drill 0.15)
  Top 0.102: v21.36,20.62 U101.PA03 | v19.43,15.77 v19.43,18.69 | v23.67,7.26 23.67,7.21 23.98,6.91 23.98,6.4 J301.16
  Bottom 0.102: v21.36,20.62 20.4,20.62 19.1,19.33 19.1,19.02 v19.43,18.69 | v19.43,15.77 19.43,12.14 23.67,7.9 v23.67,7.26
DTR_BUS0_GPIO0  (via drill 0.15)
  Top 0.102: v22.12,15.72 21.97,15.88 21.97,16.13 U101.PB12 | v25.15,12.09 v24.36,12.88 | v25.5,7.26 25.5,6.48 25.58,6.4 J301.24
  Bottom 0.102: v22.12,15.72 22.12,15.11 v24.36,12.88 | v25.15,12.09 25.63,11.61 25.63,7.39 v25.5,7.26
DTR_BUS0_GPIO1  (via drill 0.15)
  Top 0.102: v22.61,17.04 22.94,16.71 22.94,16.64 U101.PB13 | v22.99,15.49 22.99,14.43 22.86,14.3 22.86,10.85 25.15,8.56 25.53,8.56 27.18,6.91 27.18,6.4 J301.32
  Bottom 0.102: v22.61,17.04 22.61,16.03 22.99,15.65 v22.99,15.49
DTR_BUS0_SERCOM0_P0  (via drill 0.15)
  Top 0.102: v22.43,7.85 22.43,9.75 20.47,11.71 20.47,16.13 U101.PA08 | v22.43,5.21 22.43,3.81 22.4,3.79 J301.7
  Bottom 0.102: v22.43,5.21 v22.43,7.85
DTR_BUS0_SERCOM0_P1  (via drill 0.15)
  Top 0.102: v21.44,17.04 21.44,16.64 U101.PA09 | v20.14,15.75 20.14,11.73 22.1,9.78 v22.1,8.18 | v23.65,2.9 23.98,3.23 23.98,3.76 J301.15
  Route2 0.102: v20.14,15.75 v21.44,17.04
  Bottom 0.102: v22.1,8.18 22.1,4.45 v23.65,2.9
DTR_BUS0_SERCOM0_P2  (via drill 0.15)
  Top 0.102: v21.03,11.63 20.95,11.71 U101.PA10 | v25.53,4.62 25.53,3.83 25.58,3.79 J301.23
  Route2 0.102: v21.03,9.75 v21.03,11.63
  Bottom 0.102: v21.03,9.75 22.86,7.92 22.86,5.08 23.39,4.55 25.45,4.55 v25.53,4.62
DTR_BUS0_SERCOM0_P3  (via drill 0.15)
  Top 0.102: v22.15,17.02 21.97,16.84 21.97,16.64 U101.PA11 | v27.15,4.65 27.15,3.81 27.18,3.79 J301.31
  Route2 0.102: v26.82,10.9 v24.89,12.83
  Bottom 0.102: v22.15,17.02 22.15,16.18 22.66,15.67 22.66,15.06 v24.89,12.83 | v26.82,10.9 26.82,4.98 v27.15,4.65
DTR_BUS1_AIN0  (via drill 0.15)
  Top 0.102: v21.82,18.16 21.36,18.62 20.95,18.62 U101.PA04 | v21.79,15.39 21.79,10.69 22.78,9.7 22.78,6.4 J301.10
  Bottom 0.102: v21.82,18.16 21.82,15.9 21.79,15.88 v21.79,15.39
DTR_BUS1_AIN1  (via drill 0.15)
  Top 0.102: v20.04,18.11 20.45,18.11 U101.PA05 | v23.93,8.33 23.93,8.15 23.82,8.05 23.82,7.75 24.38,7.19 24.38,6.4 J301.18
  Bottom 0.102: v20.04,18.11 20.04,17.98 21.11,16.92 21.11,15.44 24.31,12.24 24.31,11.1 23.93,10.72 v23.93,8.33
DTR_BUS1_GPIO0
  Top 0.102: U101.PB14 22.45,10.74 24.97,8.23 24.97,8.08 25.45,7.59 25.65,7.59 25.98,7.26 25.98,6.4 J301.26
DTR_BUS1_GPIO1  (via drill 0.15)
  Top 0.102: v23.88,17.04 23.47,16.64 U101.PB15 | v23.44,15.06 23.44,14.58 23.06,14.2 23.06,10.95 25.25,8.76 25.73,8.76 27.58,6.91 27.58,6.4 J301.34
  Bottom 0.102: v23.88,17.04 23.88,15.49 v23.44,15.06
DTR_BUS1_SERCOM1_P0  (via drill 0.15)
  Top 0.102: v27.79,15.88 27.53,16.13 U101.PA16 | v27.25,2.9 26.92,2.56 23.5,2.56 22.81,3.25 J301.9
  Bottom 0.102: v27.79,15.88 27.79,15.7 28.65,14.83 28.65,4.29 v27.25,2.9
DTR_BUS1_SERCOM1_P1  (via drill 0.15)
  Top 0.102: v26.11,17.3 26.42,16.99 26.49,16.99 26.85,16.64 U101.PA17 | v24.49,5.21 24.49,3.86 24.41,3.79 J301.17
  Route2 0.102: v25.68,15.29 24.03,13.64 24.03,12.42 24.13,12.42 24.49,12.06 v24.49,10.79
  Bottom 0.102: v26.11,17.3 26.11,15.72 v25.68,15.29 | v24.49,5.21 v24.49,10.79
DTR_BUS1_SERCOM1_P2  (via drill 0.15)
  Top 0.102: v27.84,16.43 27.66,16.61 27.46,16.61 U101.PA18 | v29.06,5.18 27.76,5.18 27.74,5.21 26.75,5.21 26.01,4.47 26.01,3.79 J301.25
  Bottom 0.102: v27.84,16.43 29.06,15.21 v29.06,5.18
DTR_BUS1_SERCOM1_P3  (via drill 0.15)
  Top 0.102: v26.57,17.32 26.75,17.14 26.95,17.14 U101.PA19 | v28.32,13.99 28.32,12.55 v27.33,11.56 | v27.58,4.88 27.58,3.79 J301.33
  Bottom 0.102: v26.57,17.32 26.57,16.61 28.32,14.86 v28.32,13.99 | v27.33,11.56 27.33,5.13 v27.58,4.88
DTR_BUS2_AIN0  (via drill 0.15)
  Top 0.102: v18.57,13.39 18.57,19.74 20.45,21.61 U101.PC02 | v23.19,7.9 J301.12
  Bottom 0.102: v18.57,13.39 18.57,12.7 23.19,8.08 v23.19,7.9
DTR_BUS2_AIN1  (via drill 0.15)
  Top 0.102: v21.36,21.13 U101.PC03 | v24.16,7.9 24.16,7.72 24.79,7.09 J301.20
  Route2 0.102: v21.36,8.94 21.79,8.51 23.19,8.51 23.8,7.9 v24.16,7.9
  Bottom 0.102: v21.36,21.13 20.45,21.13 18.09,18.77 18.09,15.39 17.42,14.73 17.42,12.88 v21.36,8.94
DTR_BUS2_GPIO0  (via drill 0.15)
  Top 0.102: v25.3,11.46 28.6,14.76 28.6,18.21 28.25,18.57 28.25,19.38 27.99,19.63 U101.PB16 | v25.3,8.23 25.73,7.8 25.76,7.8 26.39,7.16 J301.28
  Bottom 0.102: v25.3,8.23 v25.3,11.46
DTR_BUS2_GPIO1  (via drill 0.15)
  Top 0.102: v29.59,15.95 29.59,17.53 28.45,18.67 28.45,19.48 27.81,20.12 27.46,20.12 U101.PB17 | v29.59,8.69 29.59,8.48 28.02,6.91 28.02,6.4 J301.36
  Bottom 0.102: v29.59,8.69 v29.59,15.95
DTR_BUS2_SERCOM2_P0  (via drill 0.15)
  Top 0.102: v26.16,15.29 25.96,15.49 U101.PA12 | v23.55,4.88 23.55,4.7 23.22,4.37 23.22,3.79 J301.11
  Bottom 0.102: v26.16,15.29 26.16,13.44 26.24,13.36 26.24,5.82 25.3,4.88 v23.55,4.88
DTR_BUS2_SERCOM2_P1  (via drill 0.15)
  Top 0.102: v25.7,16.97 26.04,16.97 26.36,16.64 U101.PA13 | v25.35,13.08 v25.35,14.48 | v24.82,5.54 24.82,3.79 J301.19
  Bottom 0.102: v25.7,16.97 25.7,15.8 25.35,15.44 v25.35,14.48 | v25.35,13.08 25.35,12.78 24.82,12.24 v24.82,5.54
DTR_BUS2_SERCOM2_P2  (via drill 0.15)
  Top 0.102: v26.47,15.72 26.47,16.13 U101.PA14 | v28.32,8.74 v27.66,9.4 | v26.77,2.9 26.42,3.25 26.42,3.76 J301.27
  Bottom 0.102: v26.47,15.72 26.47,15.54 27.66,14.35 v27.66,9.4 | v28.32,8.74 28.32,4.45 v26.77,2.9
DTR_BUS2_SERCOM2_P3  (via drill 0.15)
  Top 0.102: v26.98,15.72 26.98,16.13 U101.PA15 | v27.99,4.62 27.99,3.79 J301.35
  Bottom 0.102: v26.98,15.72 26.98,15.52 27.99,14.5 v27.99,4.62
DTR_BUS3_AIN0  (via drill 0.15)
  Top 0.102: v21.74,7.87 21.74,8.31 21.89,8.46 21.89,9.68 19.1,12.47 19.1,19.33 20.4,20.62 U101.PB04 | v21.74,5.54 23.24,5.54 23.6,5.89 23.6,6.38 J301.14
  Bottom 0.102: v21.74,5.54 v21.74,7.87
DTR_BUS3_AIN1  (via drill 0.15)
  Top 0.102: v19.99,19.66 20.45,20.12 U101.PB05 | v23.42,8.76 23.98,8.76 25.17,7.57 25.17,6.43 J301.22
  Bottom 0.102: v19.99,19.66 19.99,19.23 19.76,19 19.76,18.34 19.71,18.29 19.71,17.17 20.7,16.18 20.7,11.48 v23.42,8.76
DTR_BUS3_GPIO0  (via drill 0.15)
  Top 0.102: v21.36,18.14 U101.PA06 | v28.27,17.55 28.27,16 28.35,15.93 28.35,14.99 v27.15,13.79 | v26.44,5.54 26.8,5.89 26.8,6.38 J301.30
  Bottom 0.102: v21.36,18.14 21.36,18.19 22.2,19.02 26.8,19.02 v28.27,17.55 | v27.15,13.79 27.15,11.86 26.44,11.15 v26.44,5.54
DTR_BUS3_GPIO1  (via drill 0.15)
  Top 0.102: v20.04,17.5 20.17,17.63 U101.PA07 | v23.98,12.09 24.18,12.09 26.54,9.73 29.03,9.73 29.92,8.84 29.92,8.41 28.42,6.91 28.42,6.4 J301.38
  Bottom 0.102: v20.04,17.5 20.04,17.14 20.9,16.28 20.9,15.16 v23.98,12.09
DTR_BUS3_SERCOM7_P0  (via drill 0.15)
  Top 0.102: v23.6,10.9 23.44,11.05 23.44,12.83 23.77,13.16 23.77,15.21 22.96,16.03 22.96,16.13 U101.PD08 | v24.03,5.23 24.03,4.7 23.62,4.29 23.62,3.79 J301.13
  Route2 0.102: v23.6,10.9 24.49,10.01 24.49,5.54 24.33,5.54 v24.03,5.23
DTR_BUS3_SERCOM7_P1  (via drill 0.15)
  Top 0.102: v25.12,17.42 24.84,17.42 24.05,16.64 23.98,16.64 U101.PD09 | v25.12,15.72 25.12,15.19 25.7,14.61 v25.7,12.7 | v25.15,5.21 25.15,3.83 25.2,3.79 J301.21
  Bottom 0.102: v25.12,15.72 v25.12,17.42 | v25.7,12.7 25.7,11.84 25.83,11.71 25.83,6.38 25.15,5.69 v25.15,5.21
DTR_BUS3_SERCOM7_P2  (via drill 0.15)
  Top 0.102: v24.21,15.39 23.47,16.13 U101.PD10 | v26.64,4.62 26.64,4.42 26.8,4.27 26.8,3.79 J301.29
  Route2 0.102: v25.48,5.54 25.78,5.23 26.11,5.23 26.64,4.7 v26.64,4.62
  Bottom 0.102: v24.21,15.39 24.21,15.06 26.04,13.23 26.04,6.1 v25.48,5.54
DTR_BUS3_SERCOM7_P3  (via drill 0.15)
  Top 0.102: v25.98,17.75 25.32,17.09 25.02,17.09 24.56,16.64 U101.PD11 | v29.59,5.13 29.59,4.8 29.29,4.5 28.63,4.5 28.42,4.29 28.42,3.79 J301.37
  Bottom 0.102: v25.98,17.75 27.53,17.75 29.26,16.03 29.26,5.46 v29.59,5.13
DTR_DETECT  (via drill 0.15)
  Top 0.102: U101.PA21 33.98,21.63 v34.04,21.69 | v28.8,2.85 J301.39
  Route15 0.102: v34.04,21.69 34.04,3.56 33.33,2.85 v28.8,2.85
DTR_MASTER_I2C_SCL  (via drill 0.15)
  Top 0.102: SCL.TP 36.73,9.9 37.35,10.52 37.35,16.77 v37.23,16.89 | v26.19,20.73 26.31,20.85 26.31,21.39 26.95,22.03 U101.PA23 | v25.18,29.96 24.59,29.37 U203.6 | J301.40 28.95,6.25 28.95,5.77 29.24,5.47 33.74,5.47 35.2,6.94 36.26,6.94 R103.1
  Top 0.254: SCL.TP 36.75,9.27 R103.1
  Route2 0.102: v36.83,29.21 27.56,29.21 26.81,29.96 v25.18,29.96 10.14,29.96 10.1,30 9.16,30 9.14,30.03 v8.89,30.03
  Bottom 0.102: 37.16,20.64 36.85,20.95 30.38,20.95 29.95,20.52 26.76,20.52 26.65,20.62 26.29,20.62 v26.19,20.73 | v37.23,16.89 37.16,16.96 37.16,20.64 | 37.16,20.64 37.16,28.88 v36.83,29.21 | v8.89,30.03 8.89,34.92 8.26,35.56 U201.B1
DTR_MASTER_I2C_SDA  (via drill 0.15)
  Top 0.102: U101.PA22 26.52,21.2 v26.52,20.3 | SDA.TP 36.83,10.29 v36.83,17.14 | v20.95,28.91 21.42,29.37 U203.1 | v36.2,21.89 35.78,21.48 35.53,21.48 35.44,21.39 35.44,20.84 34.92,20.32 v34.92,20.26 | J301.42 29.35,6.25 29.35,5.77 29.44,5.68 33.66,5.68 35.41,7.43 R104.1
  Top 0.254: R104.1 35.59,9.04 SDA.TP
  Route2 0.102: v8.48,30.33 8.56,30.25 8.56,29.89 9.11,29.34 10.1,29.34 10.51,29.76 20.95,29.76 | 20.95,29.76 v20.95,28.91 | 20.95,29.76 24.91,29.76 25.04,29.63 25.32,29.63 25.44,29.76 26.67,29.76 26.78,29.64 26.78,29.05 26.98,28.85 27.25,28.85 27.35,28.96 36.58,28.96 36.83,28.7 v36.83,28.55
  Bottom 0.102: 34.92,20.75 36.76,20.75 36.96,20.56 36.96,20.29 36.83,20.16 v36.83,17.14 | 34.92,20.75 30.46,20.75 30.03,20.32 26.54,20.32 v26.52,20.3 | U201.C1 8.69,34.37 8.69,30.48 8.53,30.33 v8.48,30.33 | v36.83,28.55 36.83,21.59 36.2,21.59 v36.2,21.89 | v34.92,20.26 34.92,20.75
EN_STOR  (via drill 0.15)
  Top 0.102: v19.79,16.61 20.45,16.61 U101.PC06 | v15.88,14.58 v17.75,14.58 | v10.13,10.19 9.68,9.73 U204.C2
  Bottom 0.102: v17.75,14.58 v19.79,16.61 | v15.88,14.58 14.53,14.58 v10.13,10.19
EN_TEMP  (via drill 0.15)
  Top 0.102: U101.PB25 26.45,22.24 v26.31,22.1 | v27.3,31.75 U205.C2
  Route15 0.102: v26.31,22.1 26.31,23.21 26.95,23.84 26.95,24.11 27.45,24.6 27.45,29.32 27.3,29.46 v27.3,31.75
GND  (via drill 0.15)
  Top 0.102: Q203.1 34.66,15.62 v34.92,15.88 | Q201.1 35.38,21.89 v35.36,21.89
  Top 0.254: J301.5 J301.1 | U204.C1 8.1,9.71 C208.2 | C206.2 v10.97,9.12 | v8.89,36.83 8.73,36.67 C115.2 8.73,34.69 C114.2 9.94,30.45 9.96,30.42 v9.96,29.67 | U205.C1 25.1,30.91 C209.2 26.35,30.54 26.39,30.54 27.11,29.82 27.11,28.57 | J301.3 20.5,3.76 v20.45,3.81 | U203.2 21.39,28.37 v20.95,27.94 | C118.2 16.86,29.45 16.82,29.45 16.68,29.32 16.68,28.57 | C119.2 16.89,27.17 16.84,27.17 16.68,27.32 16.68,28.57 | 16.68,28.57 16.45,28.35 v16.15,28.35 | Y101.2 27.11,28.57 | 22.88,19.7 U101.GNDANA0 U101.GNDIO1 23.45,19.13 | U101.GNDIO2 24.25,18.93 | 24.25,18.93 24.6,19.28 | 24.6,19.28 24.6,19.49 24.36,19.73 24.36,19.89 v24.13,20.12 | U101.GNDIO3 24.45,18.73 24.25,18.93 | U101.GNDIO7 22.77,20.63 v22.5,20.9 | C110.2 14.78,19.04 14.78,18.27 15.1,17.95 C108.2 | Q204.1 33.04,22.21 v33.02,22.23 | C116.2 29.44,29.74 v29.44,30.4 | 27.11,28.57 26.17,28.57 C117.2 26.04,28.16 v26.36,27.84 | U102.4 12.95,2.29 | 12.95,2.29 13.18,2.52 v13.34,2.52 | U101.GNDIO4 24.75,19.13 24.6,19.28 | v23.47,19.51 23.47,19.12 23.45,19.13 | J201.2 7.26,23.22 v7.62,22.86 | 23.45,19.13 24.05,19.13 24.25,18.93 | C101.2 3.76,5.83 | 3.76,5.83 2.37,5.83 2.23,5.96 2.23,6.06 S101.2_2 1.54,7.56 2.19,8.22 2.19,8.9 1.54,9.56 S101.2_1 1.54,10.46 3.89,12.81 4.02,12.81 4.54,13.33 4.54,14.05 4.04,14.55 J101.5 | 3.76,5.83 4.33,5.83 v4.45,5.71 | U102.9 12.95,2.36 12.95,2.29 | C207.2 24.32,32.81 24.32,32.77 23.9,32.35 v23.9,32.24 | U101.GNDIO0 21.07,21.63 21.17,21.54 21.5,21.54 21.55,21.59 22.86,21.59 | U101.GNDIO5 24.93,20.12 v24.13,20.12 | U101.GNDIO6 24.45,20.44 v24.13,20.12 | Y101.4 29.76,27.08 v30.58,27.08
  Bottom 0.254: J302.5 J302.1 | 13.34,2.03 v13.34,2.52 | U201.C3 7.04,35.11 v7.04,34.29 C203.2 | C107.2 22.73,34.16 v22.86,34.29 | v20.95,27.94 22.16,26.74 C103.2 | 24.83,21.42 25.05,21.63 C112.2 25.76,21.27 25.8,21.27 25.89,21.19 v25.96,21.19 | C106.2 31.22,19.77 v31.22,19.07 31.34,18.96 C104.2 | v22.5,20.9 22.71,21.11 C105.2 | C111.2 24.43,17.56 C113.2 24.54,17.61 v25.15,18.21 | J302.3 18.68,42.79 v18.67,42.8 | R201.1 13.34,42.05 v13.34,42.55 | C201.2 7.66,38.03 7.66,38.07 7.79,38.21 8.6,38.21 8.74,38.07 8.74,36.98 v8.89,36.83 | C202.2 9.99,29.64 v9.96,29.67 | v7.62,22.86 6.35,22.86 6.35,26.73 6.22,26.86 6.22,26.96 U202.B1 U202.B2 | U202.A4 7.21,28.85 v7.21,29.16 | C204.2 8.67,28.72 8.67,28.68 8.48,28.49 v8.48,28.45
  other vias: 13.34,25.4 16.51,25.4 13.34,23.5 16.51,23.5 13.34,17.78 13.34,14.61 13.34,10.79 15.24,12.7 7.26,13.72 7.01,20.62 1.91,25.4 13.34,27.94 1.91,30.48 1.27,34.92 1.91,39.37 8.89,42.55 12.06,41.27 12.7,39.37 12.7,35.56 12.7,32.38 16.51,32.38 16.51,35.56 17.78,41.27 26.67,41.27 29.84,41.27 29.84,38.73 29.84,36.2 33.02,38.73 33.02,36.2 35.56,36.2 35.56,33.02 33.02,33.02 33.02,27.94 35.56,27.94 33.02,24.77 35.56,24.77 29.84,24.77 26.04,25.4 25.4,26.04 20.95,24.13 24.18,19.43 21.59,19.05 21.44,13.82 19.81,13.87 26.67,14.61 26.67,13.34 24.84,13.67 32.38,10.16 32.38,6.99 32.38,13.34 32.38,16.51 35.56,13.34 35.56,10.16 35.56,5.08 32.38,1.91 28.57,1.91 25.4,1.91 22.23,1.91 19.05,1.91 15.88,1.91 15.88,5.08 19.05,5.08 30.48,4.45 22.76,4.62 25.2,2.9 13.97,4.45 13.97,6.99 6.99,6.99 6.99,8.89 2.29,9.3 3.81,5.08 1.27,5.08 1.91,13.34 5.71,12.06 1.91,24.13 10.79,25.4 11.43,19.68 20.02,10.77 26.67,12.06 24.13,14.61 36.2,17.14 16.51,9.53 17.78,10.79 17.78,8.26 26.67,34.29 26.67,38.1 19.68,24.77 20.95,40.64
  pour Route2: -3.17,46.99 -3.17,-3.81 41.4,-3.81 41.4,46.99
  pour Bottom: -5.71,49.53 -5.71,-6.35 43.94,-6.35 43.94,49.53
  pour Top: -1.91,45.72 -1.91,-2.54 40.13,-2.54 40.13,45.72
  pour Route15: -4.45,-5.08 -4.45,48.26 42.55,48.26 42.55,-5.08
JTAG_NRESET
  Top 0.102: R105.2 4.81,12.1 4.81,14.17 4.58,14.4 4.58,15.19 4.04,15.73 J101.3
LED_B  (via drill 0.15)
  Top 0.102: U101.PB28 26.31,23.5 v26.31,23.67 | v34.92,23.5 36.23,23.5 Q201.3
  Route2 0.102: v26.31,23.67 34.28,23.67 34.46,23.5 v34.92,23.5
LED_G  (via drill 0.15)
  Top 0.102: U101.PB27 25.95,22.52 v25.65,22.22 | v34.92,13.97 34.27,13.97 Q203.3
  Route2 0.102: v25.65,22.22 26.29,22.86 v35.31,22.86
  Route15 0.102: v35.31,22.86 35.31,22.31 35.03,22.03 35.03,21.76 35.26,21.53 35.26,14.3 v34.92,13.97
LED_R  (via drill 0.15)
  Top 0.102: U101.PB26 26.67,23.35 26.67,24.13 v26.62,24.13 | v34.59,23.82 34.13,23.36 Q204.3
  Route2 0.102: v26.62,24.13 34.29,24.13 v34.59,23.82
LED_VIN
  Top 0.102: JP202.1 34.65,18.87 D202.4
N$4
  Top 0.102: D202.3 35.07,18.2 35.18,18.09 36.75,18.09 36.84,18.17 36.84,19.57 35.85,20.57 R202.1
N$5
  Top 0.102: R102.2 4.32,10.36 S101.1_1
  Top 0.254: S101.1_1 2.99,9.91 3.99,8.9 3.99,8.22 2.99,7.21 S101.1_2
N$12
  Top 0.102: D202.1 33.66,17.46 R203.1
N$13
  Bottom 0.254: U201.C2 7.54,35.11 7.54,35.02 7.94,34.62 C203.1
N$14
  Top 0.102: D202.2 33.59,20.26 R204.1
N$15
  Top 0.102: R202.2 36.75,22.36 Q201.2
N$16
  Top 0.102: R203.2 34.56,15.83 Q203.2
N$17
  Top 0.102: R204.2 34.49,22.13
  Top 0.254: 34.49,22.13 Q204.2
NRESET  (via drill 0.15)
  Top 0.102: C101.1 4.91,7.94 R101.1 4.91,8.85 4.7,9.06 4.7,9.33 4.89,9.53 5.55,9.53 R105.1 | R102.1 4.85,9.99 R105.1 | R105.1 6.02,10.17 8.84,12.99 8.84,20.32 7.9,21.26 4.94,21.26 4.45,21.75 4.45,25.4 4.45,31.89 4.8,32.25 4.8,42.03 6.79,44.02 v24.13,44.02 | v23.98,24.13 23.98,23.16 U101.NRESET
  Route15 0.102: v24.13,44.02 24.13,39.27 v24.38,39.01 24.38,24.38 24.13,24.13 v23.98,24.13
  Bottom 0.102: v24.38,39.01 24.2,39.19 J302.30
STOR_HOLD  (via drill 0.15)
  Top 0.102: v19.43,19.18 20.24,19.18 20.27,19.15 20.45,19.15 U101.PB07 | v16.69,17.5 16.69,15.88 11.46,10.64 11.46,9.04 9.98,7.57 U102.7
  Route2 0.102: v19.43,19.18 17.75,17.5 v16.69,17.5
STOR_SPI5_MISO  (via drill 0.15)
  Top 0.102: v21.34,21.95 21.34,22.15 20.95,22.53 U101.PB03 | v9.32,2.23 9.6,2.23 U102.2 | U102.2
  Bottom 0.102: v21.34,21.95 20.47,21.95 19.81,21.29 19.15,21.29 8.99,11.12 8.99,2.56 v9.32,2.23
STOR_SPI5_MOSI  (via drill 0.15)
  Top 0.102: v21.21,23.47 21.44,23.24 21.44,23.14 U101.PB00 | v20.12,22.38 19.94,22.38 18.41,20.85 18.41,20.5 18.29,20.37 18.29,13.59 12.52,7.82 U102.5
  Bottom 0.102: v20.12,22.38 v21.21,23.47
STOR_SPI5_NCS  (via drill 0.15)
  Top 0.102: v20.7,23.47 20.93,23.24 20.93,23.14 U101.PB02 | v8.66,2.72 8.66,1.91 U102.1 | U102.1
  Bottom 0.102: v20.7,23.47 20.37,23.47 8.66,11.76 v8.66,2.72
STOR_SPI5_SCK  (via drill 0.15)
  Top 0.102: v21.67,22.28 21.46,22.48 21.46,22.63 U101.PB01 | v18.09,20.7 18.09,14.4 11.25,7.57 U102.6
  Bottom 0.102: v21.67,22.28 20.5,22.28 19.71,21.49 18.87,21.49 v18.09,20.7
STOR_WP  (via drill 0.15)
  Top 0.102: v21.36,20.07 20.95,19.66 U101.PB06 | U102.3 v12.06,2.67 | U102.3
  Route2 0.102: v21.36,20.07 21.29,19.99 19.61,19.99 v17.75,18.14
  Bottom 0.102: v17.75,18.14 17.75,15.98 12.29,10.52 12.29,2.9 v12.06,2.67
VDD_DBG
  Bottom 0.254: J302.4 J302.2 16.05,39.19 15.49,39.75 JP201.2
VDD_DBG_JMP
  Bottom 0.254: R201.2 14.19,42.01 JP201.1 | R201.2 13.23,38.4 D201.P | Q202.1 12.44,41.85 R201.2
VDD_SW
  Bottom 0.254: JP203.1 8.29,39.98 8.34,39.93 9.36,39.93 D201.N 11.26,38.73 11.26,40.75 Q202.2
VDD_SW_IN  (via drill 0.15)
  Top 0.254: v3.81,34.92 3.81,34.08 S201.2
  Bottom 0.254: JP203.2 6.97,40.53 6.51,40.53 3.81,37.83 v3.81,34.92
VDDANA  (via drill 0.15)
  Top 0.254: L102.1 15.58,20.04 C110.1 15.94,17.84 C108.1 v15.99,17.1 v16,17.09 | v23.5,20.2 23.43,20.13 U101.VDDANA0 | v21.49,17.63 U101.VDDANA1
  Route2 0.254: v23.5,20.2 23.36,20.07 23.24,20.07 22.86,19.68 22.86,17.78 22.71,17.63 v21.49,17.63 21.44,17.63 20.9,17.09 v16,17.09
  Bottom 0.254: C105.1 23.5,21.5 v23.5,20.2
VDDCORE  (via drill 0.15)
  Top 0.254: v23.5,25.78 23.5,23.18 U101.VDDCORE
  Bottom 0.254: v23.5,25.78 23.5,25.9 C103.1 23.06,28.02 L101.P$2 22.29,31.1 C107.1 22.73,31.65 CPU.TP
VREG_BIAS
  Bottom 0.254: C204.1 6.86,27.81 U202.A3
VREG_IN
  Bottom 0.254: U201.B3 6.35,35.56 6.35,28.88 | U202.C4 5.82,28.26 5.82,28.36 6.35,28.88 | U202.A2 8.2,27.41 C202.1 9.33,28.54 9.44,28.54 9.57,28.68 9.57,29.49 9.44,29.62 7.09,29.62 6.35,28.88
VREG_LX1
  Bottom 0.254: L201.1 7.43,26.15 U202.A1
VREG_LX2
  Bottom 0.254: L201.2 4.92,26.15 U202.C1
VSW  (via drill 0.15)
  Top 0.254: U101.VSW 22.95,26.1 23.32,26.47 v23.9,26.47
  Bottom 0.254: v23.9,26.47 23.9,28.19 L101.P$1
XIN
  Top 0.102: U101.PB22 27.45,25.78 27.84,26.16 30.34,26.16 30.91,26.73 30.91,27.32 30.26,27.96 29.74,28.49 Y101.1 29.57,28.97 C116.1
XIN32
  Top 0.102: U101.PA00 20.27,23.32 20.27,26.8 20.05,27.02 20.05,27.64 18.95,28.74 Y102.1 18.4,28.91 C118.1
XOUT
  Top 0.102: U101.PB23 26.95,26.46 Y101.3 26.13,26.89 C117.1
XOUT32
  Top 0.102: U101.PA01 20.07,23.02 20.07,26.72 19.76,27.03 Y102.2 18.27,27.7 C119.1

## Text on the board
Document: Screw holes at 90 mil for M2 screws of ~79 mil diameter. / M2 screw heads are approx 150 mil diameter. There must be appropriate space for this / Standoff diameter should be <= 175mil. / Wurth Electronik makes viable standoffs